# Altium PCB boost_test.PcbDoc
Units mil, origin at the board's own origin, x right, y up, seen from the top; angles counter-clockwise.
Board outline 6000 x 4000 mil, 2 copper layers (Top Layer, Bottom Layer); 19 components, 11 nets, 54 pads, 0 vias.
Unrouted connection lines stored in the file: 37.
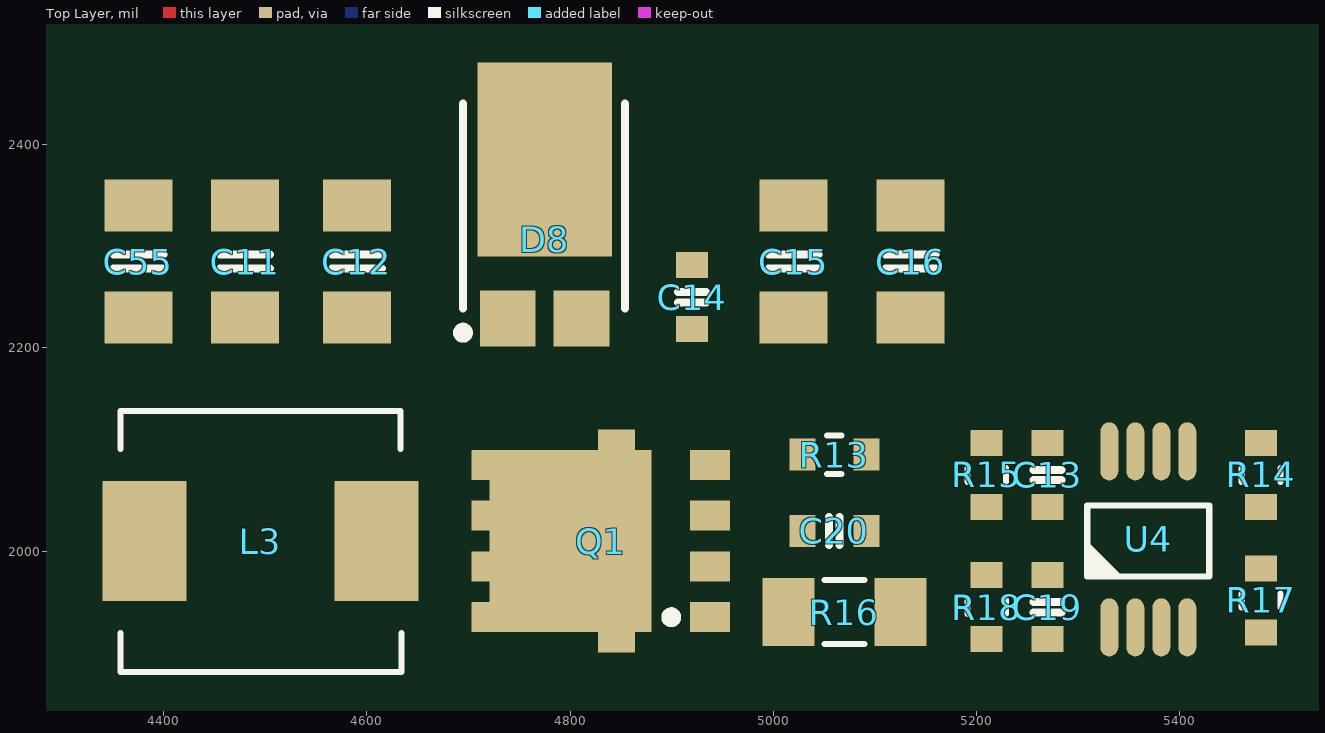
[diagram p0: Top Layer view]
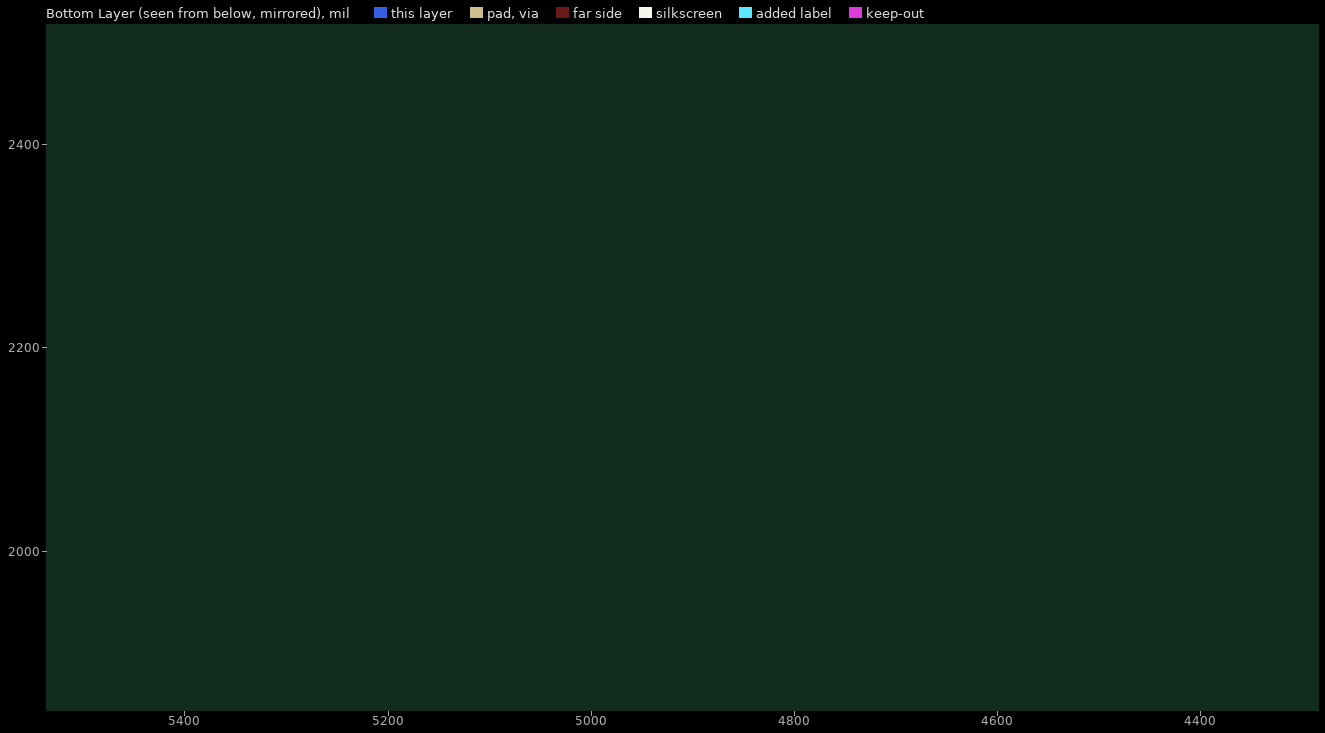
[diagram p1: Bottom Layer view, seen from below]

## Layer stack, top to bottom
Top Solder: solder mask 0.4, Solder Resist, Dk 3.5
Top Layer: signal copper 1.4
Dielectric 1: dielectric 12.6, FR-4, Dk 4.8
Bottom Layer: signal copper 1.4
Bottom Solder: solder mask 0.4, Solder Resist, Dk 3.5

## Board outline
1000,1000 7000,1000 7000,5000 1000,5000

## Design rules (kind name [scope] priority, off if disabled: settings)
Clearance [All] p1: gap=0.2 ignorepadtopadclearanceinfootprint=FALSE
PolygonConnect [All] p1: connectstyle=Relief reliefconductorwidth=10 reliefentries=4 polygonreliefangle="90 Angle" airgapwidth=10
RoutingVias [All] p1: holewidth=28 width=50 viastyle="Through Hole" minholewidth=28 minwidth=50 maxholewidth=28 maxwidth=50
SolderMaskExpansion [All] p1: expansion=4
Width [All] p1: maxlimit=10 minlimit=10 preferedwidth=10
30 further rules are at their usual default settings.

## Components (designator, comment, footprint, x,y, rotation, side; value= is the part's Value field where it differs from the comment)
C11 "100uF" CAP-1206-L 4480,2284.88 r270 top
C12 "100uF" CAP-1206-L 4590,2285 r270 top
C13 "0.1uF" CAP-0603-L 5270,2075 r270 top
C14 "0.1uF" CAP-0603-L 4920,2250 r90 top
C15 "100uF" CAP-1206-L 5020,2285 r90 top
C16 "100uF" CAP-1206-L 5135,2285 r90 top
C19 "0.1uF" CAP-0603-L 5270,1945 r90 top
C20 "10nF" CAP-0603-L 5060,2020 r180 top
C55 "100uF" CAP-1206-L 4375,2285 r270 top
D8 "SR1045L" PowerDi-5 4775,2340 r90 top
L3 "MHCI06030-5R6M" L-0630 4495,2010 r0 top
Q1 "AON6508" DFN5x6 4830,2010 r180 top
R13 "4R7" R-0603-L 5060,2095 r0 top
R14 "18.2K" R-0603-L 5480,2075 r90 top
R15 "44.2K" R-0603-L 5210,2075 r270 top
R16 "4mR" R-1206-L 5070,1940 r180 top
R17 "1K" R-0603-L 5480,1951.49 r90 top
R18 "1.4K" R-0603-L 5210,1945.01 r270 top
U4 "LM3488" MSOP_E120_P0.5_10 5370,2010 r90 top

## Footprints (in the part's own frame and the unit in brackets; to place one, negate y for a bottom-side part, rotate by r counter-clockwise, add the part's x,y. Pads: shape width x height; smd on the part's side, far side on the other; paste and mask are expansions set on the pad)
CAP-0603-L [mm]
  rect 0.65x0.8 smd: 1(-0.8,0) 2(0.8,0)
  silkscreen extent -0.13,-0.35 0.13,0.35, body extent -0.8,-0.4 0.8,0.4, height 0.8
CAP-1206-L [mm] "Chip Capacitor, 2-Leads, Body 3.20x1.60mm, IPC Medium Density"
  rect 1.3x1.7 smd: 1(-1.4,0) 2(1.4,0)
  silkscreen extent -0.18,-0.63 0.18,0.63, body extent -1.7,-0.9 1.7,0.9, height 0.5
DFN5x6 [mm]
  rect 1x0.75 smd: 1(-2.731,1.905) 2(-2.73,0.635) 3(-2.73,-0.635) 4(-2.73,-1.905) 5(2.73,1.905) 5(2.73,-0.635) 5(2.73,0.635) 5(2.731,-1.905)
  rect 0.92x0.905 smd: 5(-0.394,2.337) 5(-0.394,-2.337)
  rect 4.055x4.56 smd: 5(0.749,0)
  silkscreen extent -1.89,1.78 -1.64,2.03, body extent -3.08,-2.57 3.07,2.58, height 1.12
L-0630 [mm] "7*6.6*2.8MM(长*宽*高)"
  rect 2.1x3 smd: 1(-2.9,0) 2(2.9,0)
  silkscreen extent -3.5,-3.27 3.52,3.25, body extent -3.5,-3.25 3.52,3.25, height 2.8
MSOP_E120_P0.5_10 [mm]
  oval 1.45x0.45 smd: 1(-2.159,1) 2(-2.159,0.35) 3(-2.159,-0.3) 4(-2.159,-0.95) 5(2.241,-0.95) 6(2.241,-0.3) 7(2.241,0.35) 8(2.241,1)
  silkscreen extent -0.89,-1.5 0.89,1.55, body extent -2.45,-1.47 2.45,1.52, height 0.97
PowerDi-5 [mm]
  rect 1.4x1.39 smd: 1(-2.825,0.92) 2(-2.825,-0.92)
  rect 4.86x3.36 smd: 3(1.157,0)
  silkscreen extent -3.3,-2 2.55,2.17, body extent -3.3,-2.01 3.3,2.04, height 1.17
R-0603-L [mm]
  rect 0.65x0.8 smd: 1(-0.8,0) 2(0.8,0)
  silkscreen extent -0.18,-0.48 0.18,0.48, body extent -0.8,-0.4 0.8,0.4, height 0.45
R-1206-L [mm] "Chip Res, 2-Leads, Body 3.20x1.60mm, IPC Medium Density"
  rect 1.3x1.7 smd: 1(-1.4,0) 2(1.4,0)
  silkscreen extent -0.5,-0.8 0.5,0.8, body extent -1.6,-0.8 1.6,0.8, height 1.01

## Part data
C11 C12 C13 C14 C15 C16 C19 C20 C55: library part CAP
D8: library part Diode_1
L3: library part Inductor, "电感"
Q1: library part MOS-N_1
R13 R14 R15 R16 R17 R18: library part Res
U4: "Automotive High-Efficiency Controller for Boost, SEPIC and Fly-Back DC-DCConverters"

## Nets (pads, with @x,y where several pads share a name; then routed paths per layer and width w, separated by ;. In a path a pad name is that pad's centre, name@x,y a point inside that pad or via, vN(x,y) a via of type N, cw(c..) or ccw(c..) an arc to the next point about the centre after c; other vN are vias at no path point)
GND: C11.1 C12.1 C13.1 C14.1 C15.1 C16.1 C20.1 C55.1 R15.1 R16.1 R17.1 R18.1 U4.4 U4.5
LM_VFB: R14.1 R17.2 U4.3
NetC19_1: C19.1 R18.2
NetC19_2: C19.2 U4.2
NetC20_2: C20.2 Q1.1 Q1.2 Q1.3 R16.2 U4.1
NetD8_1: D8.1 D8.2 L3.2 Q1.5
NetQ1_4: Q1.4 R13.1
NetR13_2: R13.2 U4.6
NetR15_2: R15.2 U4.7
VCC_CAP: C11.2 C12.2 C13.2 C55.2 L3.1 U4.8
VCC_CAPBOOST: C14.2 C15.2 C16.2 D8.3 R14.2